# Altium PCB EmgAcqFinal.PcbDoc (part 2 of 2)
Units mil, origin at the board's own origin, x right, y up, seen from the top; angles counter-clockwise.
Board outline 3500 x 2175 mil, 2 copper layers (Top Layer, Bottom Layer); 116 components, 96 nets, 364 pads, 143 vias.
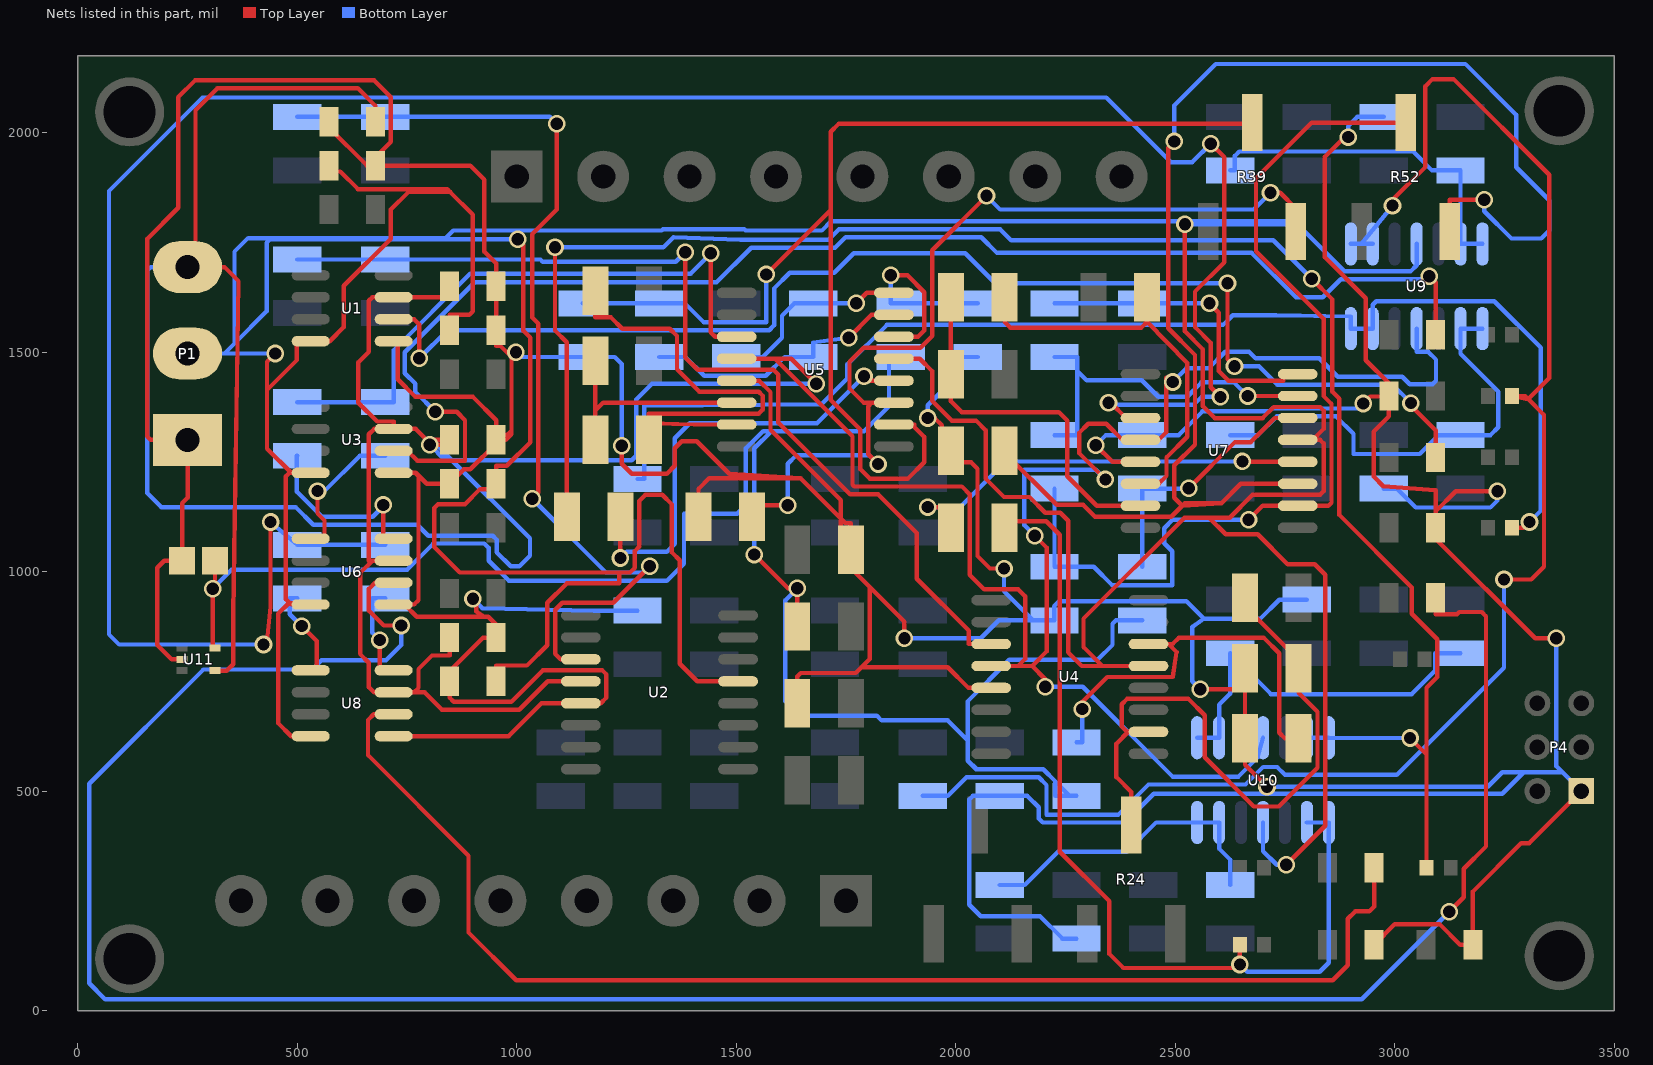
[diagram p2: the nets of this part, all layers, seen from the top]

## Via types
v1: diameter 40, hole 28, Top Layer to Bottom Layer, 143 vias

## Nets (pads, with @x,y where several pads share a name; then routed paths per layer and width w, separated by ;. In a path a pad name is that pad's centre, name@x,y a point inside that pad or via, vN(x,y) a via of type N, cw(c..) or ccw(c..) an arc to the next point about the centre after c; other vN are vias at no path point) (continued)
NetR24_2: R24.2 R28.2 R29.1 U4.10 | length 1454.9
  Top Layer w10: R24.2@2400,423.03 2400,497.99 2366.05,531.94 2366.05,607.77 2393.28,635 ; U4.10@2439.13,635 2393.28,635 ; R29.1@2658.98,940 2658.98,920.99 2781.02,798.94 R28.2@2781.02,780 2781.02,723.97 2824.05,680.94 2824.05,552.94 2736.05,464.94 2679.05,464.94 2567.05,576.94 2567.05,672.94 2530.05,709.94 2390.05,709.94 2378.05,697.94 2378.05,647 2390.05,635 2393.28,635
NetR25_1: R25.1 R30.2 U5.6 | length 509.3
  Top Layer w10: R25.1@1178.98,1300 1178.98,1367.05 ; R30.2@1178.98,1480 1178.98,1367.05 ; U5.6@1500.87,1385 1196.93,1385 1178.98,1367.05
NetR25_2: R25.2 R31.1 U5.7 | length 1114.9
  Top Layer w10: R31.1@1178.98,1640 1178.98,1579.01 1214.76,1579.01 1240.49,1553.28 1348.71,1553.28 1365.05,1536.94 1365.05,1460.94 1416.05,1409.94 1551.05,1409.94 1560.05,1400.94 1560.05,1368.94 1551.05,1359.94 1301.02,1359.94 R25.2@1301.02,1337.94 ; R25.2@1301.02,1300 R25.2@1301.02,1337.94 ; U5.7@1500.87,1335 1403.1,1335 1302.12,1337.91 R25.2@1301.02,1337.94
NetR26_1: R26.1 R27.2 U4.14 | length 966.4
  Top Layer w10: v1(2288.05,686.85) 2288.05,702.85 2345.14,759.94 2494.05,759.94 2503.05,816.94 2484.99,835 ; U4.14@2439.13,835 2484.99,835 ; R26.1@2781.02,620 2781.02,619.94 2750.05,619.94 2737.05,632.94 2737.05,813.94 2702.05,848.94 2507.99,848.94 2494.05,835 2484.99,835
  Bottom Layer w10: R27.2@2275,611.02 2288.05,611.02 v1(2288.05,686.85)
NetR32_1: R32.1 U6.1 | length 333.9
  Top Layer w10: U6.1@530.51,1075 562.05,1075 562.05,1116.51 546.05,1132.51 v1(546.05,1183.39)
  Bottom Layer w10: v1(546.05,1183.39) 562.05,1183.39 642.64,1263.98 R32.1@700,1263.98
NetR33_1: R33.1 U6.8 | length 416.9
  Top Layer w10: v1(696.05,1151.94) 696.05,1075 U6.8@719.49,1075
  Bottom Layer w10: R33.1@500,1263.98 499.05,1263.98 499.05,1181.94 556.05,1124.94 672.05,1124.94 696.05,1148.94 v1(696.05,1151.94)
NetR34_1: R34.1 R45.2 U5.15 | length 625
  Top Layer w10: v1(1756.1,1532.94) 1808.16,1585 U5.15@1859.13,1585
  Bottom Layer w10: R45.2@1325,1488.98 1383.88,1488.98 1426.91,1445.95 1567.02,1445.95 1610.05,1488.98 R34.1@1675,1488.98 1675,1521.9 v1(1756.1,1532.94)
NetR34_2: R34.2 R38.1 U5.16 | length 449.2
  Top Layer w10: v1(1773.05,1611.02) 1797.03,1635 U5.16@1859.13,1635
  Bottom Layer w10: R38.1@1500,1488.98 1560.6,1488.98 1604.12,1532.49 1604.12,1583.02 1632.13,1611.02 R34.2@1675,1611.02 v1(1773.05,1611.02)
NetR35_2: R35.2 R39.3 U5.11 | length 2134.9
  Top Layer w10: R35.2@1536.02,1125 1536.02,1150.94 v1(1617.05,1150.94) ; v1(1823.05,1244.94) 1800.86,1267.13 1800.86,1376.94 1808.91,1385 ; U5.11@1859.13,1385 1808.91,1385 ; v1(2070.05,1855.94) 1946.45,1732.34 1946.45,1536.94 1919.45,1509.94 1790.05,1509.94 1758.05,1477.94 1758.05,1417 1790.05,1385 1808.91,1385 ; v1(2717.05,1862.94) 2739.05,1862.94 2775,1826.99 R39.3@2775,1775
  Bottom Layer w10: v1(1617.05,1150.94) 1617.05,1245.49 1636.23,1264.67 1803.33,1264.67 v1(1823.05,1244.94) ; v1(2070.05,1855.94) 2101.05,1824.94 2679.05,1824.94 v1(2717.05,1862.94)
NetR36_1: R36.1 R40.2 U7.6 | length 922
  Top Layer w10: R36.1@2111.02,1625 2111.02,1568.94 2124.02,1555.94 2423.02,1555.94 2436.02,1568.94 ; U7.6@2420.87,1200 2462.05,1200 2480.05,1218 2480.05,1260.09 2527.14,1307.19 2527.14,1475.32 2436.02,1568.94 ; R40.2@2436.02,1625 2436.02,1568.94
NetR36_2: R36.2 R41.1 U7.7 | length 841.9
  Top Layer w10: R36.2@1988.98,1625 R41.1@1988.98,1450 1988.98,1388.01 2014.05,1362.94 2235.05,1362.94 2254.05,1343.94 2254.05,1216.94 2320.99,1150 U7.7@2420.87,1150
NetR37_1: R37.1 U5.12 | length 1033.7
  Top Layer w10: v1(1236.05,1030.94) R37.1@1236.02,1125 ; v1(1791.05,1444.94) 1800.99,1435 U5.12@1859.13,1435
  Bottom Layer w10: v1(1236.05,1030.94) 1250.18,1045.08 1342.05,1045.08 1360.05,1063.08 1360.05,1303.67 1394.33,1337.94 1684.05,1337.94 v1(1791.05,1444.94)
NetR39_2: R39.2 R44.2 R45.1 U5.10 | length 2830.9
  Top Layer w10: v1(1568.12,1677.02) 1715.05,1823.94 ; U5.10@1859.13,1335 1905.99,1335 1905.99,1328.94 1928.05,1306.89 1928.05,1248.94 1891.05,1211.94 1803.86,1211.94 1782.86,1232.94 1782.86,1323.13 1715.05,1390.94 1715.05,1823.94 ; R39.2@2675,2023.03 2675,2019.94 1733.05,2019.94 1715.05,2001.94 1715.05,1823.94
  Bottom Layer w10: R44.2@1150,1611.02 R45.1@1325,1611.02 1382.97,1611.02 1425.5,1568.49 1568.12,1568.49 v1(1568.12,1677.02)
NetR42_1: R42.1 R43.2 U5.14 | length 516.6
  Top Layer w10: v1(1852.05,1674.94) 1890.05,1674.94 1928.45,1636.54 1928.45,1549.34 1914.1,1535 U5.14@1859.13,1535
  Bottom Layer w10: v1(1852.05,1674.94) 1852.05,1611.02 R43.2@1875,1611.02 R42.1@2050,1611.02
NetR46_1: R46.1 U8.1 | length 219.7
  Top Layer w10: v1(510.05,875.94) 544.05,841.94 544.05,775 U8.1@530.51,775
  Bottom Layer w10: R46.1@500,938.98 483.05,938.98 483.05,902.94 v1(510.05,875.94)
NetR47_1: R47.1 U8.8 | length 231.4
  Top Layer w10: v1(688.05,843.94) 688.05,775 U8.8@719.49,775
  Bottom Layer w10: v1(688.05,843.94) 671.05,860.94 671.05,938.98 R47.1@700,938.98
NetR48_1: R48.1 R56.2 U7.15 | length 834.6
  Top Layer w10: v1(2665.05,1400) U7.15@2779.13,1400
  Bottom Layer w10: R56.2@2225,1311.02 2277.05,1311.02 2277.05,1456.94 ; R48.1@2225,1488.98 2277.05,1488.98 2277.05,1456.94 ; v1(2665.05,1400) 2634.1,1430.94 2559.64,1430.94 2527.14,1398.45 2461.14,1398.45 2423.64,1435.94 2298.05,1435.94 2277.05,1456.94
NetR48_2: R48.2 R51.1 U7.16 | length 720
  Top Layer w10: v1(2578.05,1611.02) 2599.14,1589.93 2599.14,1456.94 2621.14,1434.94 2746.05,1434.94 2746.05,1450 U7.16@2779.13,1450
  Bottom Layer w10: R48.2@2225,1611.02 R51.1@2425,1611.02 v1(2578.05,1611.02)
NetR49_2: R49.2 R52.3 U7.11 | length 3342.2
  Top Layer w10: R49.2@2111.02,1275 2111.02,1270.94 2229.88,1152.09 2290.05,1152.09 2317.19,1124.94 2491.05,1124.94 2516.06,1149.96 ; v1(2498.05,1979.94) 2484.05,1965.94 2484.05,1554.41 2545.14,1493.32 2545.14,1289.19 2498.05,1242.09 2498.05,1167.98 2516.06,1149.96 ; U7.11@2779.13,1200 2649.57,1200 2605.55,1155.98 ; R52.3@3125,1775 3125,1846.9 v1(3204.05,1846.9) ; 2516.06,1149.96 2605.55,1155.98 ; 2516.06,1149.96 2522.08,1155.98 2605.55,1155.98
  Bottom Layer w10: v1(2498.05,1979.94) 2498.05,2061.94 2592.5,2156.39 3161.06,2156.39 3277.05,2040.4 3277.05,1920.94 3352.05,1845.94 3352.05,1776.94 3334.05,1758.94 3266.05,1758.94 3204.05,1820.94 v1(3204.05,1846.9)
NetR50_1: R50.1 U7.12 | length 986.4
  Top Layer w10: v1(1936.05,1146.94) 1988.98,1146.94 R50.1@1988.98,1100 ; v1(2653.05,1250.94) 2653.99,1250 U7.12@2779.13,1250
  Bottom Layer w10: v1(1936.05,1146.94) 2010.05,1146.94 2114.05,1250.94 v1(2653.05,1250.94)
NetR52_2: R52.2 R55.2 R56.1 U7.10 | length 2210.5
  Top Layer w10: v1(2667.05,1117.94) 2699.1,1150 U7.10@2779.13,1150 2849.05,1150 2856.05,1157 2856.05,1381.94 2838.05,1399.94 2838.05,1575.94 2684.05,1729.94 2684.05,1895.94 2811.05,2022.94 3025,2022.94 R52.2@3025,2023.03
  Bottom Layer w10: R56.1@2225,1188.98 R55.2@2225,1011.02 2314.35,1011.02 2356.88,968.49 2493.12,968.49 2493.12,1046.48 2475.05,1064.55 2475.05,1098.94 2494.05,1117.94 v1(2667.05,1117.94)
NetR53_1: R53.1 R54.2 U7.14 | length 598.8
  Top Layer w10: v1(2531.05,1189.94) 2636.1,1295 2671.85,1295 2726.85,1350 U7.14@2779.13,1350
  Bottom Layer w10: R54.2@2425,1011.02 R53.1@2425,1188.98 2530.08,1188.98 v1(2531.05,1189.94)
PAMP1: R1.2 R4.2 U2.3 | length 2250.3
  Top Layer w10: v1(1035.05,1165.94) 1049.05,1179.94 1049.05,1564.94 1035.05,1578.94 1035.05,1768.94 1091.05,1824.94 v1(1091.05,2019.94) ; U2.3@1145.87,800 1100.05,800 1087.59,812.46 1087.59,912.94 1103.59,928.94 1220.05,928.94 v1(1303.05,1011.94)
  Bottom Layer w10: R4.2@500,2036.02 R1.2@700,2036.02 1074.97,2036.02 v1(1091.05,2019.94) ; v1(1035.05,1165.94) 1203.05,997.94 1289.05,997.94 v1(1303.05,1011.94)
PAMP2: R16.2 R18.2 U4.3 | length 2244.8
  Top Layer w10: v1(1384.05,1727.77) 1384.05,1487.94 1412.05,1459.94 1584.68,1459.94 1596.05,1448.58 1596.05,1339.25 1759.36,1175.94 1823.05,1175.94 1911.13,1087.86 1911.13,983.88 2030.05,864.96 2030.05,835 U4.3@2080.87,835
  Bottom Layer w10: R18.2@500,1711.02 R16.2@700,1711.02 1054.05,1711.02 1059.13,1705.94 1362.22,1705.94 v1(1384.05,1727.77)
PAMP3: R32.2 R33.2 U5.3 | length 1395
  Top Layer w10: v1(1442.05,1724.94) 1442.05,1544.94 1451.99,1535 U5.3@1500.87,1535
  Bottom Layer w10: R33.2@500,1386.02 R32.2@700,1386.02 720.05,1386.02 720.05,1504.94 894.05,1678.94 1396.05,1678.94 v1(1442.05,1724.94)
PAMP4: R46.2 R47.2 U7.3 | length 5603.9
  Top Layer w10: v1(423.05,833.94) 431.05,841.94 439.05,919.94 v1(439.05,1112.94) ; v1(2348.05,1384.94) 2353.05,1384.94 2387.99,1350 U7.3@2420.87,1350 ; v1(2581.05,1974.94) 2612.05,1943.94 2612.05,1704.94 2545.05,1637.94 2545.05,1557.04 2581.14,1520.94 2581.14,1419.85 v1(2603.05,1397.94)
  Bottom Layer w10: v1(423.05,833.94) 94.05,833.94 71.05,856.94 71.05,1866.94 284.05,2079.94 2343.05,2079.94 2490.05,1932.94 2539.05,1932.94 v1(2581.05,1974.94) ; v1(439.05,1112.94) R46.2@500,1061.02 599.05,1061.02 R47.2@700,1061.02 ; v1(2348.05,1384.94) 2352.55,1380.45 2542.55,1380.45 2560.05,1397.94 v1(2603.05,1397.94)
V+: C1.1 C4.1 C7.1 C10.1 P1.3 U1.7 U2.4 U3.7 U4.4 U5.4 U6.7 U7.4 U8.7 U9.4 U10.4 U11.4 | length 11164.4
  Top Layer w10: P1.3@250,1693.7 P1.3@268.05,1693.7 ; U11.4@312.4,774.41 339.41,774.41 354.05,789.05 354.05,903.48 365.94,1661.8 334.05,1693.7 P1.3@268.05,1693.7 ; C1.1@678.15,2025 678.15,2060.84 638.05,2100.94 318.05,2100.94 268.05,2050.94 P1.3@268.05,1693.7 ; U6.7@719.49,1025 671.1,1025 ; v1(802.05,1288.94) 846.85,1288.94 C7.1@846.85,1300 795.05,1300 770.05,1325 U3.7@719.49,1325 ; C10.1@846.85,850 846.85,808.75 806.85,808.75 776.05,777.94 776.05,735 766.05,725 ; C4.1@846.85,1650 830.2,1650 830.2,1625 U1.7@719.49,1625 671.1,1625 663.05,1616.94 663.05,1500.55 639.05,1476.55 639.05,1384.94 682.05,1341.94 719.49,1341.94 U3.7@719.49,1325 ; U2.4@1145.87,750 1070.27,750 1005.81,685.53 829.46,685.53 789.99,725 766.05,725 ; U5.4@1500.87,1485 1587.99,1485 ; v1(1682.05,1427.95) 1625,1485 1587.99,1485 ; U4.4@2080.87,785 2142.05,785 ; v1(2180.05,1081.94) 2207.05,1054.94 2207.05,818 2174.05,785 ; v1(2204.05,737.85) 2204.05,755 2174.05,785 ; v1(2341.05,1209.94) 2281.05,1269.94 2281.05,1315.94 2302.05,1336.94 2343.1,1336.94 2380.05,1300 U7.4@2420.87,1300 2462.05,1300 2479.14,1317.1 2479.14,1441.94 2484.05,1441.94 v1(2494.05,1431.94) ; 671.1,1025 643.05,996.94 643.05,812.48 663.01,792.52 663.01,736.94 674.95,725 U8.7@719.49,725 766.05,725 ; 671.1,1025 663.05,1025 663.05,1312.94 675.1,1325 U3.7@719.49,1325 ; 1587.99,1485 1764.86,1308.13 1764.86,1197.94 1768.86,1193.94 2014.05,1193.94 2031.51,1176.48 2031.51,992.94 2064.51,959.94 2142.05,959.94 2158.05,943.94 2158.05,801 2142.05,785 ; 2142.05,785 2174.05,785
  Bottom Layer w10: P1.3@250,1693.7 166.05,1693.7 158.05,1685.7 158.05,1178.94 190.05,1146.94 496.05,1146.94 536.05,1106.94 773.05,1106.94 798.05,1081.94 945.05,1081.94 954.05,1072.94 954.05,1043.94 986.05,1011.94 1006.05,1011.94 1030.05,1035.94 1030.05,1075.94 852.05,1253.94 ; v1(1682.05,1427.95) 1308.05,1427.95 1272.05,1391.94 1272.05,1263.94 1262.05,1253.94 852.05,1253.94 ; v1(2180.05,1081.94) 2156.05,1105.94 2156.05,1231.94 2319.05,1231.94 v1(2341.05,1209.94) ; v1(2204.05,737.85) 2289.14,737.85 2494.05,532.94 2644.11,532.94 2687.58,576.41 U10.4@2700,621.46 ; v1(2494.05,1431.94) 2525.05,1462.94 2576.05,1462.94 2614.05,1500.94 2668.05,1500.94 2683.05,1485.94 2828.05,1485.94 2870.05,1443.94 3017.05,1443.94 3034.05,1426.94 3086.05,1426.94 3094.05,1434.94 3094.05,1482.94 3076.05,1500.94 3050,1500.94 U9.4@3050,1553.54 ; 852.05,1253.94 817.05,1288.94 v1(802.05,1288.94) 837.05,1253.94 852.05,1253.94
V-: C3.2 C6.2 C9.2 C12.2 P1.2 U1.4 U2.13 U3.4 U4.13 U5.13 U6.4 U7.13 U8.4 U9.11 U10.11 | length 13572.9
  Top Layer w10: v1(450.05,1496.85) 431.05,1477.85 431.05,1413.94 ; U8.4@530.51,625 486.05,625 456.2,654.84 456.2,903.8 481.7,929.29 ; U3.4@530.51,1225 486.05,1225 ; C3.2@571.85,1925 571.85,1911.47 598.05,1911.47 638.05,1871.47 841.52,1871.47 848.05,1864.94 ; C6.2@846.85,1550 846.85,1584.94 892.05,1584.94 900.05,1592.94 900.05,1812.94 848.05,1864.94 ; C12.2@953.15,750 953.15,786.05 1023.15,786.05 1069.59,832.49 1069.59,928.94 1113.68,973.03 1233.71,973.03 1233.71,997.94 ; v1(1002.05,1756.94) 1015.05,1743.94 1015.05,1548.94 1031.05,1532.94 1031.05,1294.94 977.05,1240.94 953.15,1240.94 C9.2@953.15,1200 953.15,1187.94 916.46,1187.94 882.05,1153.53 820.64,1153.53 812.05,1144.94 812.05,1055.94 870.05,997.94 1233.71,997.94 ; U2.13@1504.13,750 1410.99,750 1371.05,789.94 1371.05,1025.88 1353.45,1043.48 1353.45,1152.94 1331.45,1174.94 1293.05,1174.94 1279.05,1160.94 1279.05,1056.94 1269.05,1046.94 1269.05,1008.94 1258.05,997.94 1233.71,997.94 ; U5.13@1859.13,1485 1918.05,1485 1946.05,1457 1946.05,1388.94 1991.05,1343.94 2046.05,1343.94 2068.05,1321.94 2068.05,1211.94 2110.05,1169.94 2168.05,1169.94 2204.05,1133.94 2238.05,1133.94 2256.05,1115.94 2256.05,815.94 2286.99,785 2334.05,785 ; U4.13@2439.13,785 2334.05,785 ; v1(2522.05,1791.52) 2522.05,1547.32 2563.14,1506.22 2563.14,1376.64 2590.05,1349.74 2699.05,1349.74 2724.25,1374.94 2830.05,1374.94 2838.05,1366.94 2838.05,1324.94 U7.13@2813.1,1300 ; v1(2753.05,331.94) 2842.05,420.94 2842.05,992.94 2818.05,1016.94 2756.05,1016.94 2688.05,1084.94 2615.05,1084.94 2577.05,1122.94 ; U7.13@2779.13,1300 U7.13@2813.1,1300 ; 431.05,1413.94 431.05,1280 486.05,1225 ; 431.05,1413.94 499.05,1481.94 499.05,1525 U1.4@530.51,1525 574.05,1525 606.05,1557 606.05,1650.94 713.05,1757.94 713.05,1824.94 753.05,1864.94 848.05,1864.94 ; 481.7,929.29 U6.4@530.51,925 485.99,925 481.7,929.29 ; 481.7,929.29 474.05,936.94 474.05,1216.94 482.1,1225 486.05,1225 ; 2334.05,785 2291.05,828 2291.05,892.94 2521.05,1122.94 2577.05,1122.94 ; 2577.05,1122.94 2624.05,1122.94 2676.05,1174.94 2830.05,1174.94 2838.05,1182.94 2838.05,1292 2830.05,1300 U7.13@2813.1,1300
  Bottom Layer w10: P1.2@250,1496.85 334.05,1496.85 ; v1(450.05,1496.85) 334.05,1496.85 ; v1(1002.05,1756.94) 438.05,1756.94 430.05,1748.94 430.05,1592.85 357.05,1519.85 ; v1(2522.05,1791.52) 2778.47,1791.52 ; U10.11@2700,428.54 2700,362.99 2731.05,331.94 v1(2753.05,331.94) ; U9.11@3050,1746.46 3050,1697.9 3036.05,1683.94 2886.05,1683.94 2778.47,1791.52 ; 334.05,1496.85 357.05,1519.85 ; 357.05,1519.85 357.05,1728.94 387.9,1759.8 837.9,1759.8 855.05,1776.94 1330.05,1776.94 1333.05,1779.94 1518.05,1779.94 1521.05,1776.94 1695.05,1776.94 1716.05,1797.94 2772.05,1797.94 2778.47,1791.52
VGND: C1.2 C3.1 C4.2 C6.1 C7.2 C9.1 C10.2 C12.1 C13.2 C22.1 C23.1 C24.1 C25.1 P1.1 P4.1 R5.1 R11.2 R14.1 R21.1 R26.2 R28.1 R35.1 R42.2 R44.1 R49.1 R53.2 R55.1 R61.2 R62.2 R63.2 R64.2 U1.5 U2.5 U3.5 U4.5 U5.5 U6.5 U7.5 U8.5 U11.2 | length 18195.2
  Top Layer w10: U11.2@237.6,800 213.88,800 180.94,832.94 180.94,1008.94 196.99,1025 C13.2@237.6,1025 237.6,1155.94 250,1168.34 P1.1@250,1300 166.05,1300 158.05,1308 158.05,1757.94 229.05,1828.94 229.05,2080.94 267.05,2118.94 675.05,2118.94 713.05,2080.94 713.05,1978.84 678.15,1943.94 C3.1@678.15,1925 ; C1.2@571.85,2025 571.85,2011.71 658.56,1925 C3.1@678.15,1925 ; U8.5@719.49,625 981.27,625 1056.27,700 U2.5@1145.87,700 1191.2,700 1204.14,712.94 1204.14,765.85 1195.05,774.94 1059.22,774.94 987.81,703.53 856.26,703.53 846.85,712.94 C12.1@846.85,750 846.85,772.94 922.95,849.04 953.15,849.04 C10.2@953.15,850 953.15,878.94 935.15,896.94 926.18,896.94 ; U6.5@719.49,925 U6.5@744.05,925 ; U3.5@719.49,1225 767.99,1225 ; U1.5@719.49,1525 729.05,1525 729.05,1437.94 769.05,1397.94 900.15,1397.94 953.15,1344.94 C7.2@953.15,1311.94 ; v1(900.05,937.94) 908.05,929.94 908.05,909.05 926.18,896.94 ; v1(998.05,1499.94) 988.05,1489.94 v1@988.05,1488.94 ; v1(1239.05,1286.94) 1239.05,1245.94 1262.05,1222.94 1342.05,1222.94 1360.05,1240.94 1360.05,1280.94 1376.05,1296.94 1410.05,1296.94 1484.05,1222.94 1646.48,1212.51 ; R35.1@1413.98,1125 1413.98,1188.44 1438.05,1212.51 1646.48,1212.51 ; U5.5@1500.87,1435 1551.99,1435 1578.05,1408.94 1578.05,1322.94 1738.05,1162.94 1738.05,1120.94 ; R14.1@1638.98,700 1638.98,760.94 1646.98,768.94 1772.05,768.94 1785.05,781.94 ; v1(1883.05,847.94) 1883.05,885.92 1804.05,964.92 ; v1(1936.05,1349.94) 1951.87,1349.94 1968.05,1333.76 1968.05,1275 R49.1@1988.98,1275 1988.98,1248.94 2035.01,1248.94 2049.51,1234.44 2049.51,1035.48 2078.05,1006.94 v1(2110.05,1006.94) ; U4.5@2080.87,735 2028.99,735 1982.05,781.94 1785.05,781.94 ; v1(2319.05,1288) 2357.05,1250 U7.5@2420.87,1250 ; v1(2557.05,731.94) R28.1@2658.98,731.94 ; R28.1@2658.98,780 R28.1@2658.98,731.94 ; v1(2709.05,509.94) 2658.98,560.01 R26.2@2658.98,620 R28.1@2658.98,731.94 ; v1(2894.05,1989.94) 2886.05,1989.94 2841.05,1944.94 2841.05,1716.04 2934.2,1622.89 2934.2,1481.6 2986.85,1428.94 C23.1@2986.85,1400 C23.1@2986.85,1398.94 ; v1(2928.05,1382.94) 2944.05,1398.94 C23.1@2986.85,1398.94 ; C25.1@2953.15,150 3000.09,196.94 3102.05,196.94 3148.99,150 C24.1@3178.15,150 3178.15,271.17 3288.49,381.51 3306.51,381.51 P4.1@3425,500 ; v1(3234.05,1182.94) 3139.15,1182.94 3093.15,1136.94 ; v1(3368.05,847.94) 3320.05,847.94 3093.15,1074.84 C22.1@3093.15,1100 3093.15,1136.94 ; C3.1@678.15,1925 894.05,1925 926.05,1893 926.05,1729.05 953.15,1701.94 C4.2@953.15,1650 C6.1@953.15,1550 953.15,1514.05 962.95,1514.05 v1@988.05,1488.94 ; U6.5@744.05,925 772.1,896.94 926.18,896.94 ; U6.5@744.05,925 766.05,925 776.05,935 776.05,1216.94 767.99,1225 ; 767.99,1225 770.05,1225 795.05,1200 C9.1@846.85,1200 879.75,1232.9 894.1,1232.9 953.15,1291.95 C7.2@953.15,1299.94 ; C7.2@953.15,1299.94 C7.2@953.15,1300 C7.2@953.15,1311.94 ; C7.2@953.15,1299.94 975.05,1299.94 988.05,1312.94 988.05,1320.94 ; C7.2@953.15,1311.94 979.05,1311.94 988.05,1320.94 ; 988.05,1320.94 v1@988.05,1488.94 ; 1646.48,1212.51 1738.05,1120.94 ; 1738.05,1120.94 1738.05,1075.94 R11.2@1761.02,1075.94 ; 1738.05,1120.94 1749.05,1109.94 1761.02,1109.94 R11.2@1761.02,1075.94 ; R11.2@1761.02,1075.94 R11.2@1761.02,1050 1761.02,1007.94 1804.05,964.92 ; 1785.05,781.94 1804.05,800.94 1804.05,964.92 ; C23.1@2986.85,1398.94 2986.85,1353.75 2952.05,1318.94 2952.05,1216.62 2974.05,1194.62 3093.15,1184.94 3093.15,1136.94
  Bottom Layer w10: v1(900.05,937.94) 921.05,916.94 1175.97,911.02 R5.1@1275,911.02 ; v1(998.05,1499.94) 998.05,1496.98 1006.05,1488.98 R44.1@1150,1488.98 1223.02,1488.98 1239.05,1472.94 v1(1239.05,1286.94) ; v1(1883.05,847.94) 2057.02,847.94 2098.05,888.98 R55.1@2176.05,888.98 ; v1(1936.05,1349.94) 1936.05,1378.94 1998.05,1440.94 1998.05,1488.98 R42.2@2050,1488.98 ; v1(2110.05,1006.94) 2110.05,954.98 R55.1@2176.05,888.98 ; R55.1@2225,888.98 R55.1@2224.05,888.98 ; R64.2@2275,163.98 2243.02,163.98 2192.05,214.94 2057.05,214.94 2031.05,240.94 2031.05,480.94 2039.08,488.98 R21.1@2100,488.98 2163.02,488.98 2188.88,463.11 2188.88,437.61 2198.05,428.45 2385.25,428.45 2450.99,494.19 3245.29,494.19 3294.05,542.94 ; v1(2319.05,1288) 2342.07,1311.02 R53.2@2425,1311.02 2508.05,1311.02 2561.97,1364.94 2713.88,1364.94 2720.49,1371.55 2924.66,1371.55 2928.05,1374.94 v1(2928.05,1382.94) ; v1(2557.05,731.94) 2538.88,750.11 2538.88,873.78 2565.05,892.94 ; v1(2709.05,509.94) 3212.05,509.94 3245.05,542.94 3294.05,542.94 ; R63.2@2800,936.02 2737.13,936.02 2694.05,892.94 2565.05,892.94 ; v1(2894.05,1989.94) 2894.05,2014.94 2915.13,2036.02 R62.2@2975,2036.02 ; R61.2@2975,1188.98 3005.05,1188.98 3048.08,1145.94 3218.12,1145.94 3234.05,1161.87 v1(3234.05,1182.94) ; v1(3368.05,847.94) 3368.05,556.95 3382.06,542.94 ; P4.1@3425,500 3382.06,542.94 ; R55.1@2176.05,888.98 R55.1@2224.05,888.98 ; R55.1@2224.05,888.98 2224.05,920.94 2235.6,932.49 2525.5,932.49 2565.05,892.94 ; 3294.05,542.94 3382.06,542.94
VOUTHPFLT1: R57.2 R65.2 U9.1 U9.2 | length 1026.7
  Bottom Layer w10: R65.2@2625,1311.02 2688.52,1311.02 2731.05,1353.55 2866.44,1353.55 2906.05,1313.94 2906.05,1267.94 3056.97,1267.94 3100.05,1311.02 R57.2@3150,1311.02 3218.2,1311.02 3236.12,1328.94 3236.12,1410.06 3150,1496.18 U9.2@3150,1553.54 U9.1@3200,1553.54
VOUTHPFLT2: R58.2 R68.2 U9.13 U9.14 | length 797.4
  Bottom Layer w10: R68.2@2625,1913.98 2636.05,1913.98 2636.05,1946.94 2646.05,1956.94 3042.05,1956.94 3085.02,1913.98 R58.2@3150,1913.98 U9.13@3150,1746.46 U9.14@3200,1746.46
VOUTHPFLT3: R59.2 R69.2 U10.1 U10.2 | length 878.4
  Bottom Layer w10: U10.1@2550,621.46 U10.2@2600,621.46 2600,696.45 2625,721.45 R59.2@2625,813.98 2718.03,720.94 3039.12,720.94 3092.05,773.87 3092.05,813.98 R69.2@3150,813.98
VOUTHPFLT4: R60.2 R72.2 U10.13 U10.14 | length 711.9
  Bottom Layer w10: R60.2@2100,286.02 2157.13,286.02 2233.05,361.94 2389.75,361.94 2456.35,428.54 U10.14@2550,428.54 U10.13@2600,428.54 2600,368.94 2625,343.94 R72.2@2625,286.02
VOUTLPFLT1: C26.1 R8.2 U9.6 U9.7 | length 2909.4
  Top Layer w10: C26.1@3267.56,1100 3294.1,1100 v1(3307.05,1112.94)
  Bottom Layer w10: R8.2@1275,1211.02 1290.05,1211.02 1290.05,1377.94 1694.05,1381.21 1753.28,1440.44 1753.28,1472.17 1843.13,1562.02 2608.93,1562.02 2630.88,1583.98 2730.03,1583.98 2900,1581.12 U9.7@2900,1553.54 U9.6@2950,1553.54 2950,1607.9 2958.05,1615.94 3227.05,1615.94 3333.05,1509.94 3333.05,1138.94 v1(3307.05,1112.94)
VOUTLPFLT2: C28.1 R22.2 U9.8 U9.9 | length 3722.8
  Top Layer w10: v1(2995.05,1833.94) 2995.05,1846.94 3070.05,1921.94 3070.05,2105.94 3086.05,2121.94 3134.05,2121.94 3352.05,1903.94 3352.05,1440.94 3304.08,1392.97 ; v1(3249.05,981.94) 3311.05,981.94 3340.05,1010.94 3340.05,1357 3304.08,1392.97 ; 3304.08,1392.97 3297.05,1400 C28.1@3267.56,1400 3304.08,1392.97
  Bottom Layer w10: R22.2@1925,488.98 1982.05,488.98 2024.58,531.51 2189.05,531.51 2206.88,513.67 2206.88,446.45 2370.55,446.45 2439.05,514.94 2660.22,514.94 2700.22,554.94 2732.05,554.94 2750.05,536.94 3005.05,536.94 3249.05,780.94 v1(3249.05,981.94) ; U9.8@2900,1746.46 2924.05,1746.46 ; U9.9@2950,1746.46 2924.05,1746.46 ; v1(2995.05,1833.94) 2934.35,1759.16 2924.05,1746.46
VOUTLPFLT3: C27.1 R37.2 U10.6 U10.7 | length 4174.5
  Top Layer w10: v1(1087.05,1738.94) 1087.05,1549.28 1113.98,1522.35 R37.2@1113.98,1125 ; v1(2811.05,1666.94) 2858.05,1619.94 2858.05,1409.81 2874.05,1393.81 2874.05,1128.86 3039.05,963.86 3039.05,903.94 3097.05,845.94 3097.05,759.94 3072.44,735.34 3072.44,583.55 ; v1(3035.05,620.94) 3072.44,583.55 ; C27.1@3072.44,325 3072.44,583.55
  Bottom Layer w10: v1(1087.05,1738.94) 1334.05,1738.94 1357.05,1761.94 1509.05,1755.94 1710.05,1755.94 1734.05,1779.94 2101.05,1779.94 2126.05,1754.94 2723.05,1754.94 v1(2811.05,1666.94) ; U10.6@2800,621.46 U10.7@2850,621.46 2850,620.94 v1(3035.05,620.94)
VOUTLPFLT4: C29.1 R50.2 U10.8 U10.9 | length 2102.2
  Top Layer w10: R50.2@2111.02,1100 2111.02,1114.94 2206.05,1114.94 2237.05,1083.94 2237.05,361.94 2350.05,248.94 2350.05,128.94 2382.05,96.94 2639.44,96.94 v1(2647.44,104.94) C29.1@2647.44,150
  Bottom Layer w10: v1(2647.44,104.94) 2664.01,88.37 2829.48,88.37 2850,108.9 U10.8@2850,428.54 U10.9@2800,428.54
VOUTPAM1: C14.2 U1.6 | length 2937.9
  Top Layer w10: U1.6@719.49,1575 766.05,1575 778.05,1563 v1(778.05,1485.94) ; v1(2619.05,1656.94) 2619.05,1483.94 v1(2635.05,1467.94) ; v1(3037.05,1383.94) 3037.05,1378.05 3093.15,1321.94 C14.2@3093.15,1260
  Bottom Layer w10: v1(778.05,1485.94) 842.05,1549.94 1575.12,1549.94 1586.12,1560.94 1586.12,1645.02 1622.05,1680.94 1723.33,1680.94 1767.73,1725.34 2021.65,1725.34 2090.05,1656.94 v1(2619.05,1656.94) ; v1(2635.05,1467.94) 2690.88,1467.94 2732.88,1425.94 2995.05,1425.94 v1(3037.05,1383.94)
VOUTPAM2: C17.2 U3.6 | length 3162.2
  Top Layer w10: U3.6@719.49,1275 751.05,1275 773.1,1252.94 882.05,1252.94 882.05,1344.94 863.05,1363.94 v1(814.05,1363.94) ; v1(3079.05,1672.94) 3093.15,1658.84 C17.2@3093.15,1540
  Bottom Layer w10: v1(814.05,1363.94) 769.05,1408.94 769.05,1427.94 745.05,1451.94 745.05,1499.94 904.05,1658.94 1455.05,1658.94 1534.05,1737.94 1725.05,1737.94 1749.05,1761.94 2058.05,1761.94 2094.05,1725.94 2674.05,1725.94 2775.13,1624.86 2835.96,1624.86 2877.05,1665.94 3072.05,1665.94 v1(3079.05,1672.94)
VOUTPAM3: C18.2 U6.6 | length 5602.3
  Top Layer w10: U6.6@719.49,975 677.63,975 663.18,960.55 663.18,910.81 696.72,877.27 v1(737.05,877.27) ; C18.2@3093.15,940 3093.15,902.94 3142.05,902.94 3147.05,907.94 3198.05,907.94 3208.05,897.94 3208.05,373.94 3157.05,322.94 3157.05,257.94 v1(3124.05,224.94)
  Bottom Layer w10: v1(737.05,877.27) 737.05,832.89 702.05,797.89 555.05,797.89 534.1,776.94 286.05,776.94 26.05,516.94 26.05,61.94 62.05,25.94 2925.05,25.94 v1(3124.05,224.94)
VOUTPAM4: C21.2 U8.6 | length 2970.7
  Top Layer w10: U8.6@719.49,675 674.05,675 661.05,662 661.05,581.94 890.05,352.94 890.05,177.94 999.05,68.94 2859.05,68.94 2893.05,102.94 2893.05,208.94 2910.05,225.94 2942.05,225.94 2953.15,237.05 C21.2@2953.15,325
VREF2.5: C13.1 R12.1 R27.1 R43.1 R54.1 U11.5 | length 4692.3
  Top Layer w10: U11.5@312.4,825.59 307.05,825.59 v1(307.05,960.94) 312.4,960.94 C13.1@312.4,1025 ; v1(1541.05,1038.87) 1617.98,961.94 v1@1638.98,961.94 ; R12.1@1638.98,875 v1@1638.98,961.94 ; v1(1639.05,961.94) v1@1638.98,961.94
  Bottom Layer w10: v1(307.05,960.94) 350.05,1003.94 750.05,1003.94 810.05,1063.94 926.05,1063.94 936.05,1053.94 936.05,1024.94 982.05,978.94 1342.05,978.94 1381.05,1017.94 1381.05,1131.94 1502.05,1131.94 1522.05,1151.94 1522.05,1280.94 1561.05,1319.94 1580.05,1319.94 ; v1(1541.05,1038.87) 1541.05,1280.94 1580.05,1319.94 ; v1(1639.05,961.94) 1612.05,934.94 1612.05,704.94 1645.05,671.94 1820.05,671.94 1831.05,660.94 1982.05,660.94 2027.05,615.94 ; R43.1@1875,1488.98 1848.05,1488.98 1848.05,1376.94 1791.05,1319.94 1580.05,1319.94 ; R27.1@2275,488.98 R27.1@2260.02,488.98 ; R54.1@2425,888.98 2365.08,888.98 2357.05,880.94 2357.05,832.94 2323.05,798.94 2122.05,798.94 2027.05,703.94 2027.05,615.94 ; 2027.05,570.94 2027.05,568.94 2046.05,549.94 2048.05,549.94 ; 2027.05,570.94 2027.05,615.94 ; 2027.05,570.94 2048.05,549.94 ; 2048.05,549.94 2048.49,549.51 2199.49,549.51 ; 2048.05,549.94 2199.05,549.94 2199.49,549.51 ; 2199.49,549.51 2227.05,521.94 ; 2227.05,521.94 2227.05,488.98 R27.1@2260.02,488.98 ; 2227.05,521.94 R27.1@2260.02,488.98
pads on no net: P4.4 R10.1 R24.1 R39.1 R52.1 U2.8 U2.9 U4.8 U4.9 U5.8 U5.9 U7.8 U7.9 U11.1 U11.3

## Polygon pours and split planes (outlines as drawn)
VGND on Bottom Layer "Bottom Overlay-No Net" (solid, pour order 2): 0,2175 3500,2175 3500,0 0,0 0,2175

## Silkscreen, mask and mechanical layers (free items; w line width, h text height)
Top Overlay:
  text "CH3" at 2725,2125 h39.37
  text "CH4" at 3075,2125 h39.37
  text "SH3" at 950,2075 h39.37
  text "EA3" at 1150,2075 h39.37
  text "EB3" at 1350,2075 h39.37
  text "RLD3" at 1525,2075 h39.37
  text "SH4" at 1725,2075 h39.37
  text "EA4" at 1925,2075 h39.37
  text "EB4" at 2125,2075 h39.37
  text "RLD4" at 2325,2075 h39.37
  text "V+" at 25,1750 h39.37 r270
  text "V-" at 25,1525 h39.37 r270
  text "VGND" at 25,1350 h39.37 r270
  text "1-VGND 2-CH1 3-CH2" at 3400,1175 h39.37 r90
  text "4-NC   5-CH4 6-CH3" at 3475,1175 h39.37 r90
  text "Dextra - EMG Acq-4" at 50,1150 h118.11 r270
  text "RLD2" at 300,25 h39.37
  text "EB2" at 525,25 h39.37
  text "EA2" at 725,25 h39.37
  text "SH2" at 925,25 h39.37
  text "RLD1" at 1100,25 h39.37
  text "EB1" at 1300,25 h39.37
  text "EA1" at 1500,25 h39.37
  text "SH1" at 1700,25 h39.37
  text "CH1" at 2100,25 h39.37
  text "CH2" at 2450,25 h39.37
Bottom Overlay:
  text "J Alvarez - 2011" at 1150,25 h60

## Text inside footprints (layer, text, board x,y; h text height)
P4: Top Overlay "4" at 3342.32,259.84 h50 r90; Top Overlay "1" at 3456.5,275.59 h50 r90; Top Overlay "3" at 3452.56,909.45 h50 r90; Top Overlay "6" at 3346.26,909.45 h50 r90